# Altium PCB PCB-ForNAProj.PcbDoc
Units mm, origin at the board's own origin, x right, y up, seen from the top; angles counter-clockwise.
Board outline 180 x 225 mm, 2 copper layers (Top Layer, Bottom Layer); 119 components, 105 nets, 331 pads, 0 vias.
Unrouted connection lines stored in the file: 3.
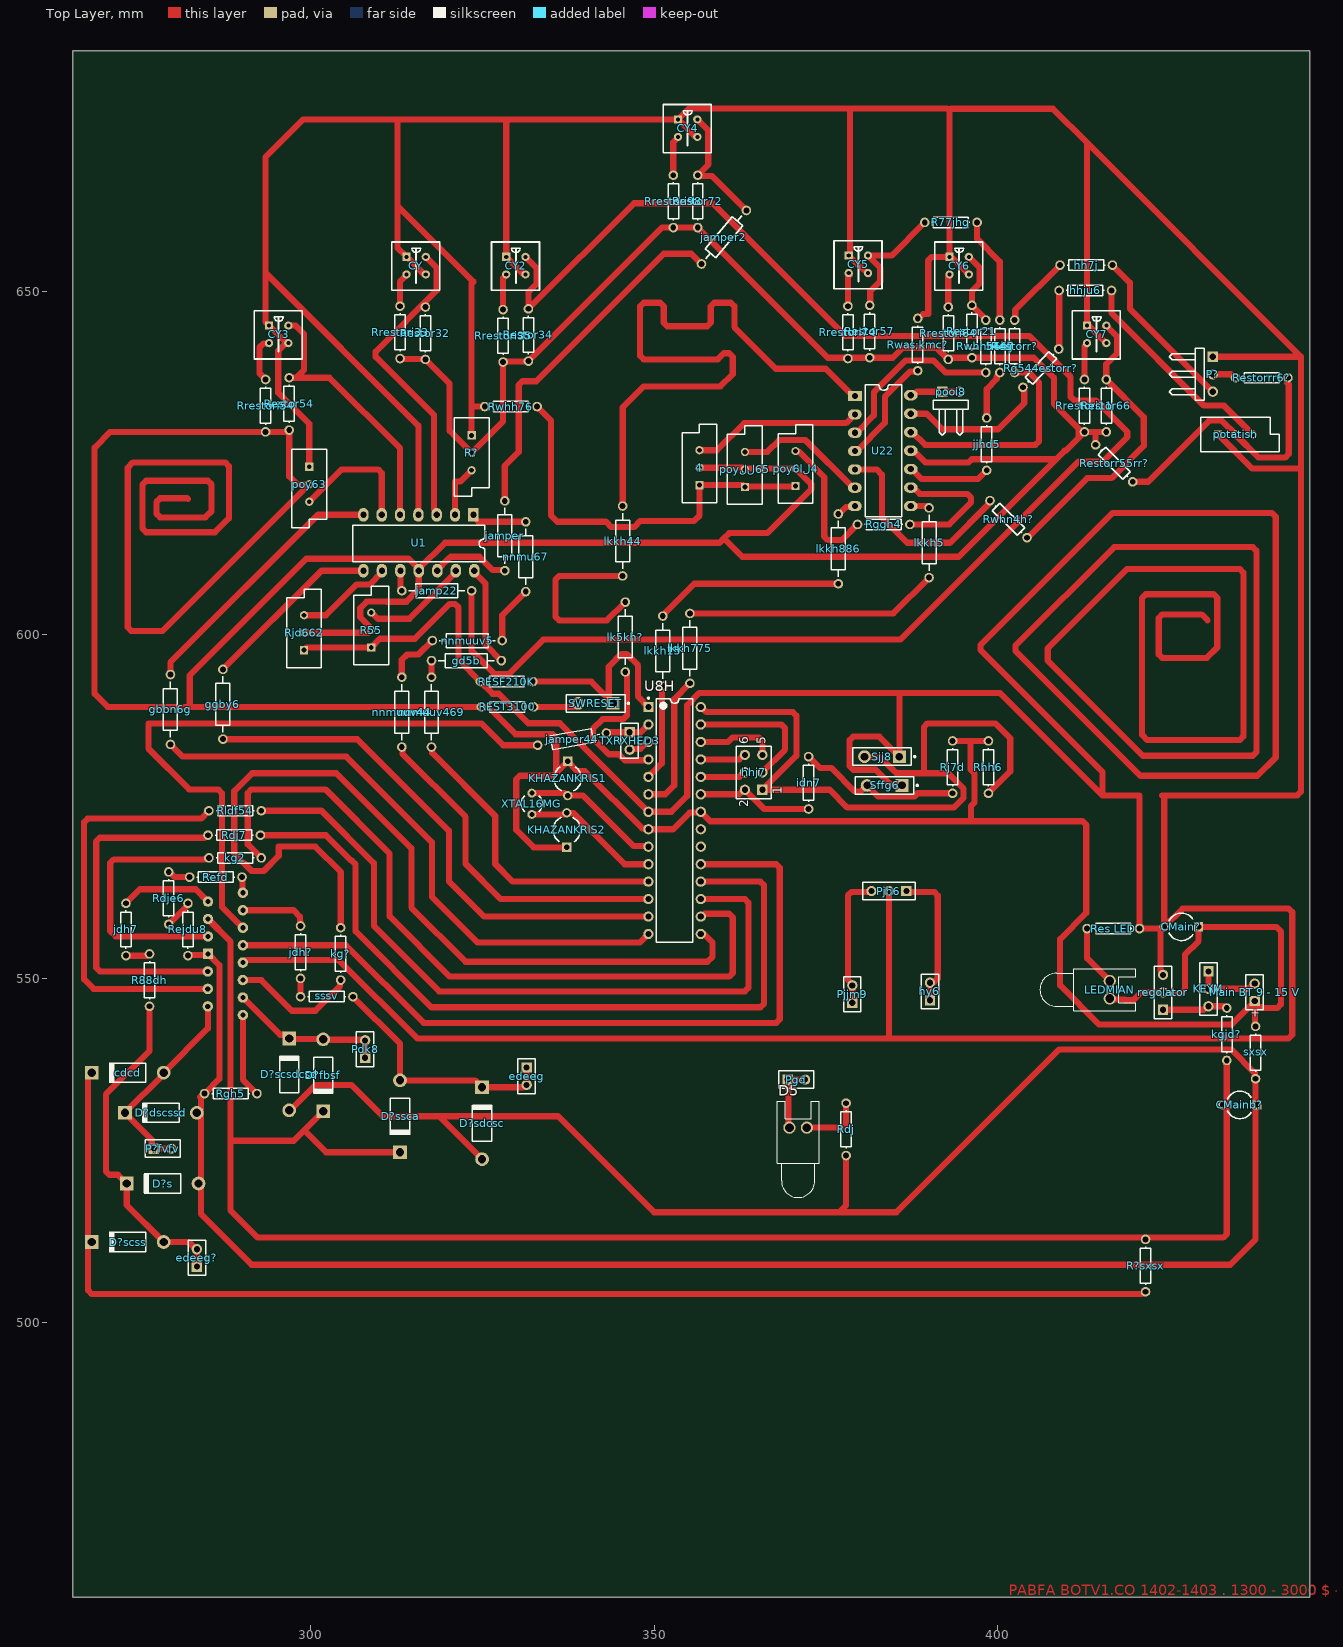
[diagram p0: Top Layer view]
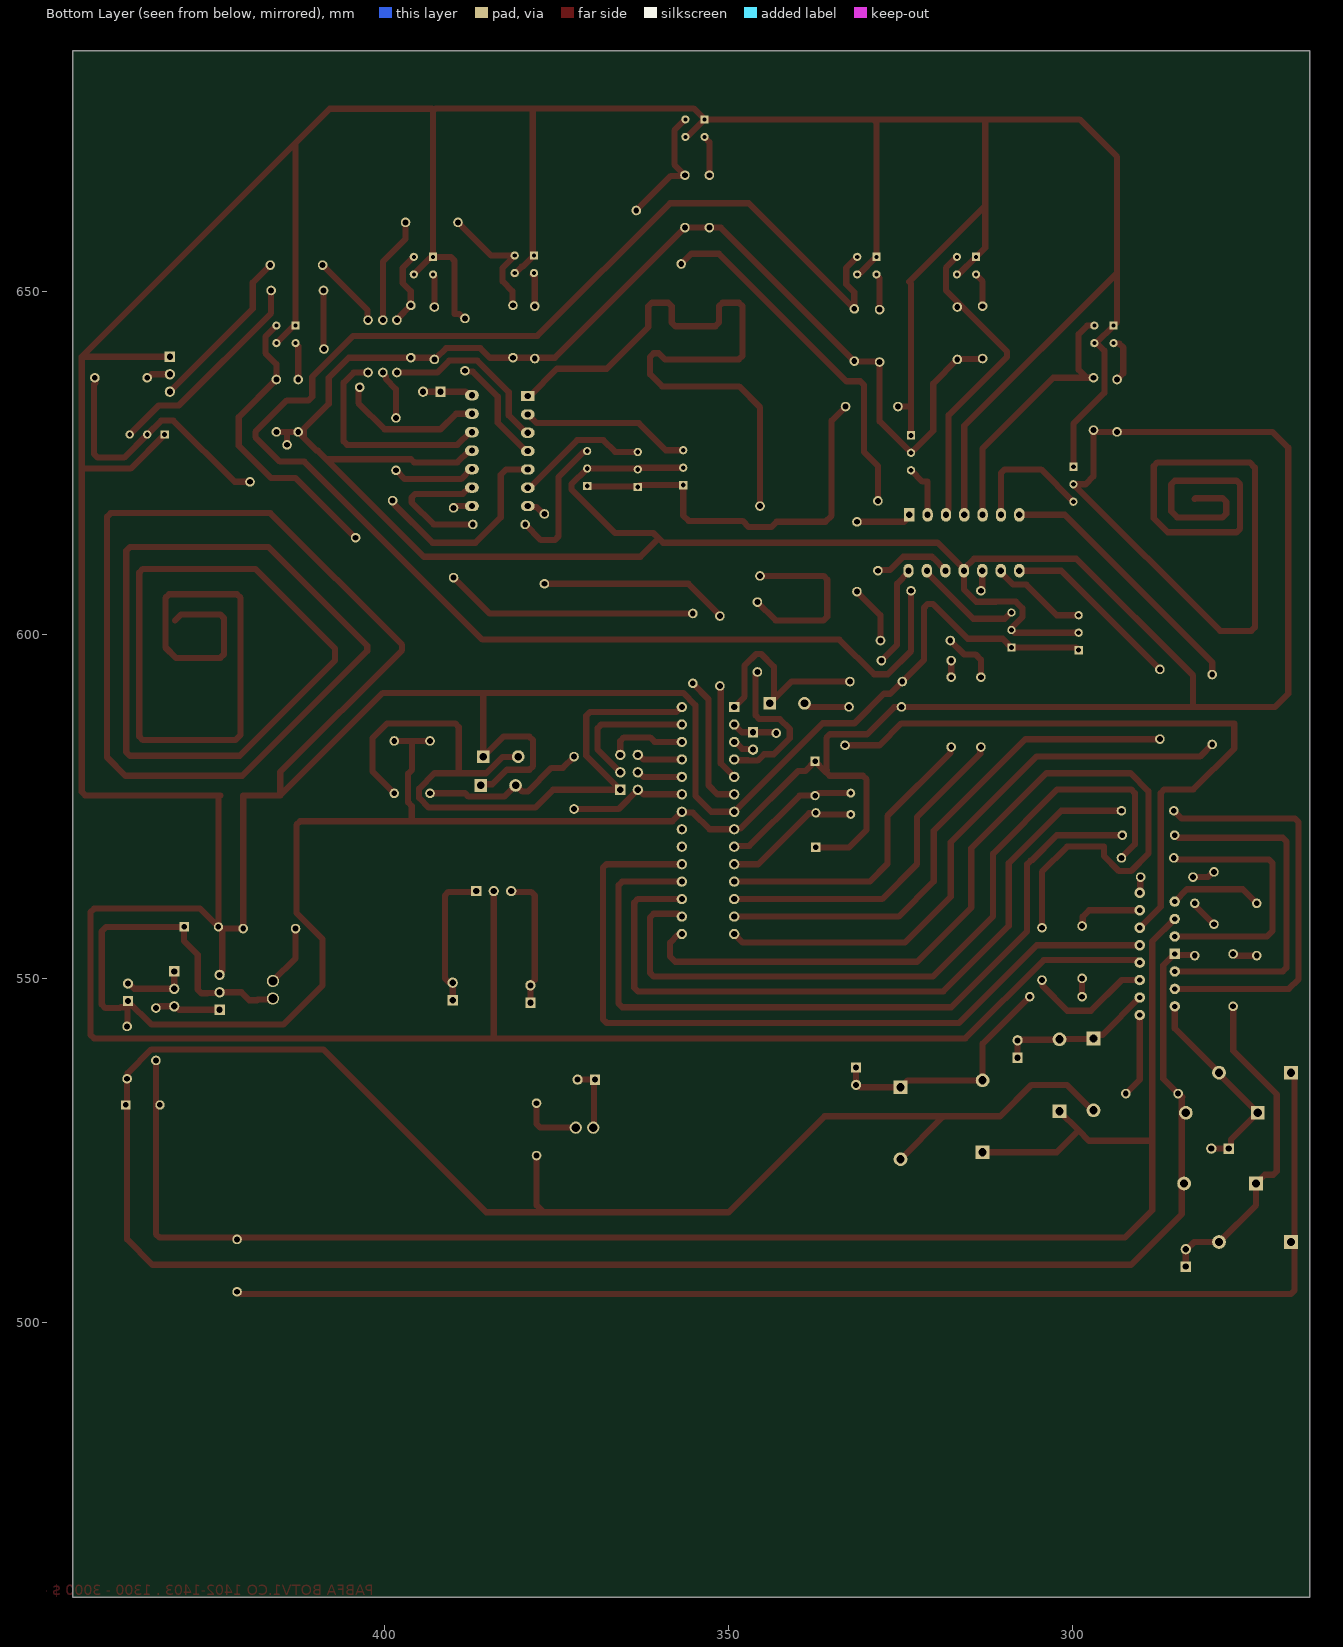
[diagram p1: Bottom Layer view, seen from below]

## Layer stack, top to bottom
Top Solder: solder mask 0.0102, Solder Resist, Dk 3.5
Top Layer: signal copper 0.0356
Dielectric 1: dielectric 0.32, FR-4, Dk 4.8
Bottom Layer: signal copper 0.0356
Bottom Solder: solder mask 0.0102, Solder Resist, Dk 3.5

## Board outline
265.43,459.994 265.43,684.994 445.43,684.994 445.43,459.994

## Design rules (kind name [scope] priority, off if disabled: settings)
Clearance [All] p1: gap=0.254 ignorepadtopadclearanceinfootprint=FALSE except(0: Arc-Hole Track-Hole SMDPad-Hole THPad-Hole Via-Hole Fill-Hole Poly-Hole Region-Hole Text-Hole; 0.7: Arc-Arc Arc-Track Track-Track)
PolygonConnect [All] p1: connectstyle=Relief reliefconductorwidth=0.254 reliefentries=4 polygonreliefangle="90 Angle" airgapwidth=0.254
RoutingVias [All] p1: holewidth=0.711 width=1.27 viastyle="Through Hole" minholewidth=0.711 minwidth=1.27 maxholewidth=0.711 maxwidth=1.27
SolderMaskExpansion [All] p1: expansion=0.102 istentingtop=FALSE
Width [All] p1: maxlimit=0.9 minlimit=0.7 preferedwidth=0.8
30 further rules are at their usual default settings.

## Components (designator, comment, footprint, x,y, rotation, side; value= is the part's Value field where it differs from the comment)
4 "RPot" VR5 356.616,624.332 r90 top value=1K
544lj "Res1" AXIAL-0.3 400.304,641.985 r270 top value=1K
* "driver" PCBComponent_1 290.195,562.483 r180 top
cdcd "Diode 1N4007" DO-41 273.431,536.321 r180 top
CMain? "Cap2IN" CAPR5-4X5 426.72,557.53 r180 top value=100pF
CMainb? "Cap2IN" CAPR5-4X5 435.229,531.622 r180 top value=100pF
CY "CY" CY70 314,655 r0 top
CY2 "CY" CY70 328.5,655 r0 top
CY3 "CY" CY70 294,645 r0 top
CY4 "CY" CY70 353.5,675 r0 top
CY5 "CY" CY70 378.327,655.193 r0 top
CY6 "CY" CY70 393,655 r0 top
CY7 "CY" CY70 413,645 r0 top
D5 "LED0" LED-0 370.967,528.32 r0 top
D?dscssd "Diode 1N4007" DO-41 278.257,530.479 r180 top
D?fbsf "Diode 1N4007" DO-41 301.879,535.94 r270 top
D?s "Diode 1N4007" DO-41 278.511,520.192 r180 top
D?scsdcsd "Diode 1N4007" DO-41 296.926,536.067 r90 top
D?scss "Diode 1N4007" DO-41 273.431,511.683 r180 top
D?sdcsc "Diode 1N4007" DO-41 324.993,528.955 r90 top
D?ssca "Diode 1N4007" DO-41 313.055,529.971 r270 top
edeeg "Header 2" HDR1X2 331.47,537.083 r270 top
edeeg? "Header 2" HDR1X2 283.492,508.102 r90 top
gbbn6g "Res2" AXIAL-0.4 279.654,589.153 r270 top value=1K
gd5b "Res2" AXIAL-0.4 322.707,596.265 r180 top value=1K
ggby6 "Res2" AXIAL-0.4 287.274,589.915 r270 top value=1K
hh7j "Res1" AXIAL-0.3 412.877,653.796 r180 top value=1K
hhj7 "Header 3X2" HDR2X3 365.76,577.469 r90 top
hhju6 "Res1" AXIAL-0.3 412.75,650.113 r0 top value=1K
hy6 "Header 2" HDR1X2 390.144,546.862 r90 top
idn7 "Res1" AXIAL-0.3 372.491,578.485 r270 top value=1K
jamp22 "Res2" AXIAL-0.4 318.389,606.425 r0 top value=1K
jamper "Res2" AXIAL-0.4 328.295,614.426 r90 top value=1K
jamper2 "Res2" AXIAL-0.4 360.172,657.86 r50 top value=1K
jamper44 "Res2" AXIAL-0.4 338.074,584.835 r10 top value=1K
jdh7 "Res1" AXIAL-0.3 273.177,557.149 r90 top value=1K
jdh? "Res1" AXIAL-0.3 298.577,553.847 r90 top value=1K
jjhd5 "Res1" AXIAL-0.3 398.399,627.761 r270 top value=1K
KEYM "Header 3" HDR1X3 430.657,551.053 r270 top
kg2 "Res1" AXIAL-0.3 289.052,567.563 r180 top value=1K
kg? "Res1" AXIAL-0.3 304.419,553.593 r270 top value=1K
kgjd? "Res1" AXIAL-0.3 433.324,541.909 r90 top value=1K
KHAZANKRIS1 "Cap2" CAPR5-4X5 337.439,579.12 r270 top value=100pF
KHAZANKRIS2 "Cap2" CAPR5-4X5 337.312,571.627 r90 top value=100pF
LEDMIAN "LED0" LED-0 416.306,548.386 r270 top
lk5kh? "Res2" AXIAL-0.4 345.821,599.694 r90 top value=1K
lkkh5 "Res2" AXIAL-0.4 390.017,613.41 r270 top value=1K
lkkh15 "Res2" AXIAL-0.4 351.282,597.662 r270 top value=1K
lkkh44 "Res2" AXIAL-0.4 345.44,613.664 r90 top value=1K
lkkh775 "Res2" AXIAL-0.4 355.219,598.043 r270 top value=1K
lkkh886 "Res2" AXIAL-0.4 376.809,612.521 r270 top value=1K
"Main BT 9 - 15 V" "Battery Main" BAT-2 437.388,548.005 r90 top
nnmu67 "Res2" AXIAL-0.4 331.343,611.378 r270 top value=1K
nnmuuv5 "Res2" AXIAL-0.4 322.834,599.186 r180 top value=1K
nnmuuv44 "Res2" AXIAL-0.4 313.309,588.772 r90 top value=1K
nnmuuv469 "Res2" AXIAL-0.4 317.627,588.772 r270 top value=1K
P? "Header 3H" HDR1X3H 431.292,640.461 r270 top
P?fvfv "Header 2" HDR1X2 277.241,525.272 r0 top
Pdk8 "Header 2" HDR1X2 307.975,538.48 r90 top
Pgd "Header 2" HDR1X2 369.443,535.305 r0 top
Pjh6 "Header 3" HDR1X3 386.715,562.737 r180 top
Pjjm9 "Header 2" HDR1X2 378.841,546.481 r90 top
pooi8 "Header 2H" HDR1X2H 391.922,635.381 r0 top
potatish "RPot" VR5 434.594,629.158 r0 top value=1K
poy6ال4 "RPot" VR5 370.586,624.205 r90 top value=1K
poy63 "RPot" VR5 299.847,621.919 r270 top value=1K
poyلل65 "RPot" VR5 363.22,624.078 r90 top value=1K
R55 "RPot" VR5 308.864,600.71 r90 top value=1K
R77jhg "Res1" AXIAL-0.3 393.192,660.019 r0 top value=1K
R88dh "Res1" AXIAL-0.3 276.606,549.783 r90 top value=1K
R? "RPot" VR5 323.469,626.491 r270 top value=1K
R?sxsx "Res1" AXIAL-0.3 421.513,508.254 r90 top value=1K
Rdj "Res1" AXIAL-0.3 377.952,528.066 r90 top value=1K
Rdj7 "Res1" AXIAL-0.3 288.925,570.865 r180 top value=1K
Rdje6 "Res1" AXIAL-0.3 279.4,561.721 r270 top value=1K
Refd "Res1" AXIAL-0.3 286.258,564.769 r180 top value=1K
regolator "Header 3" HDR1X3 424.053,545.465 r90 top
Rejdu8 "Res1" AXIAL-0.3 282.194,557.149 r270 top value=1K
"Res LED" "Res 220 LED" AXIAL-0.3 416.814,557.276 r180 top value=220
RESF210K "Res1" AXIAL-0.3 328.549,593.217 r0 top value=1K
REST3100 "Res1" AXIAL-0.3 328.676,589.534 r0 top value=1K
Restor21 "Res1" AXIAL-0.3 396.24,644.144 r270 top value=1K
Restor32 "Res1" AXIAL-0.3 316.738,643.89 r270 top value=1K
Restor34 "Res1" AXIAL-0.3 331.724,643.636 r270 top value=1K
Restor54 "Res1" AXIAL-0.3 296.926,633.603 r270 top value=1K
Restor57 "Res1" AXIAL-0.3 381.381,644.144 r270 top value=1K
Restor66 "Res1" AXIAL-0.3 415.798,633.349 r270 top value=1K
Restor72 "Res1" AXIAL-0.3 356.362,663.067 r270 top value=1K
Restorr55rr? "Res1" AXIAL-0.3 416.941,624.967 r135 top value=1K
Restorr? "Res1" AXIAL-0.3 402.463,641.985 r270 top value=1K
Restorrr6? "Res1" AXIAL-0.3 438.404,637.413 r0 top value=1K
Rg544estorr? "Res1" AXIAL-0.3 406.273,638.81 r227 top value=1K
Rggh4 "Res1" AXIAL-0.3 383.413,616.077 r180 top value=1K
Rgh5 "Res1" AXIAL-0.3 288.417,533.273 r0 top value=1K
Rhh6 "Res1" AXIAL-0.3 398.653,580.771 r270 top value=1K
Rj7d "Res1" AXIAL-0.3 393.446,580.771 r270 top value=1K
Rjd662 "RPot" VR5 299.085,600.329 r90 top value=1K
Rldf54 "Res1" AXIAL-0.3 289.052,574.421 r180 top value=1K
Rrestori11 "Res1" AXIAL-0.3 412.623,633.349 r90 top value=1K
Rrestori33 "Res1" AXIAL-0.3 313.055,644.017 r90 top value=1K
Rrestori35 "Res1" AXIAL-0.3 328.041,643.509 r90 top value=1K
Rrestori54 "Res1" AXIAL-0.3 293.497,633.349 r90 top value=1K
Rrestori64 "Res1" AXIAL-0.3 392.811,643.89 r90 top value=1K
Rrestori74 "Res1" AXIAL-0.3 378.206,644.017 r90 top value=1K
Rrestori98 "Res1" AXIAL-0.3 352.806,663.067 r90 top value=1K
Rwas;kmc? "Res1" AXIAL-0.3 388.366,642.239 r90 top value=1K
Rwhh76 "Res1" AXIAL-0.3 329.184,633.222 r0 top value=1K
Rwhhh6h? "Res1" AXIAL-0.3 398.272,641.985 r270 top value=1K
Rwhn4h? "Res1" AXIAL-0.3 401.574,616.839 r135 top value=1K
Sffg6 "SW-PB" SPST-2 383.54,578.104 r180 top
Sjj8 "SW-PB" SPST-2 383.159,582.295 r180 top
sssv "Res1" AXIAL-0.3 302.387,547.37 r180 top value=1K
SWRESET "SW-PB" SPST-2 341.503,590.042 r180 top
sxsx "Res1" AXIAL-0.3 437.515,539.242 r90 top value=1K
TXRXHED3 "Header 2" HDR1X2 346.456,585.851 r270 top
U1 "Lm324" Lm324 315.087,612.775 r180 top (schematic designator u1)
U8H "ATmega328-PU" 28P3 353,573 r0 top
U22 "Lm324" Lm324 383.921,626.11 r270 top
XTAL16MG "XTAL" R38 332.232,575.437 r180 top

## Footprints (in the part's own frame and the unit in brackets; to place one, negate y for a bottom-side part, rotate by r counter-clockwise, add the part's x,y. Pads: shape width x height; smd on the part's side, far side on the other; paste and mask are expansions set on the pad)
28P3 [mm] "28-Pin Plastic Dual In-Line Package (PDIP)"
  rect 1.5x1.5 hole 0.9: 1(-3.81,16.51)
  round 1.5 hole 0.9: 2(-3.81,13.97) 3(-3.81,11.43) 4(-3.81,8.89) 5(-3.81,6.35) 6(-3.81,3.81) 7(-3.81,1.27) 8(-3.81,-1.27) 9(-3.81,-3.81) 10(-3.81,-6.35) 11(-3.81,-8.89) 12(-3.81,-11.43) 13(-3.81,-13.97) 14(-3.81,-16.51) 15(3.81,-16.51) 16(3.81,-13.97) 17(3.81,-11.43) 18(3.81,-8.89) 19(3.81,-6.35) 20(3.81,-3.81) 21(3.81,-1.27) 22(3.81,1.27) 23(3.81,3.81) 24(3.81,6.35) 25(3.81,8.89) 26(3.81,11.43) 27(3.81,13.97) 28(3.81,16.51)
  silkscreen extent -3.93,-17.7 2.65,17.93, body extent -3.6,-17.65 3.6,17.65, height 4.58
AXIAL-0.3 [mm] "Axial Device, Thru-Hole; 2 Leads; 0.3 in Pin Spacing"
  round 1.4 hole 0.85: 1(-3.81,0) 2(3.81,0)
  silkscreen extent -2.77,-0.76 2.77,0.76
AXIAL-0.4 [mm] "Axial Device, Thru-Hole; 2 Leads; 0.4 in Pin Spacing"
  round 1.4 hole 0.85: 1(-5.08,0) 2(5.08,0)
  silkscreen extent -4.06,-1.02 4.06,1.02
BAT-2 [mm] "Battery; 2 Leads"
  rect 1.5x1.5 hole 0.9: 1(-1.27,0)
  round 1.5 hole 0.9: 2(1.27,0)
  silkscreen extent -2.54,-1.27 2.54,1.27
CAPR5-4X5 [mm] "Capacitor; 2 Leads"
  rect 1.35x1.35 hole 0.8: 1(-2.5,0)
  round 1.35 hole 0.8: 2(2.5,0)
  silkscreen extent -1.69,-2 1.82,2
CY70 [mm]
  round 1.2 hole 0.6: 5(2.8,0) 7(2.8,-2.55) 8(0,-2.55)
  rect 1.2x1.2 hole 0.6: 9(0,0)
  silkscreen extent -2.16,-4.85 4.84,2.15
DO-41 [mm] "Diode, Axial; Body 5.2 x 2.7 mm (LxDia. max), Lead Dia. 0.86 mm (max)"
  round 2 hole 1.2: 1(-5.23,0)
  rect 2x2 hole 1.2: 2(5.23,0)
  silkscreen extent -2.65,-1.4 2.75,1.4
HDR1X2 [mm] "Connector; Header; 2 Position"
  rect 1.5x1.5 hole 0.9: 1(0,0)
  round 1.5 hole 0.9: 2(2.54,0)
  silkscreen extent -1.27,-1.27 3.81,1.27
HDR1X2H [mm] "Connector; Header; 2 Position; Right Angle"
  rect 1.5x1.5 hole 0.9: 1(0,0)
  round 1.5 hole 0.9: 2(2.54,0)
  silkscreen extent -1.27,-6.35 3.81,-1.27
HDR1X3 [mm] "Connector; Header; 3 Position"
  rect 1.5x1.5 hole 0.9: 1(0,0)
  round 1.5 hole 0.9: 2(2.54,0) 3(5.08,0)
  silkscreen extent -1.27,-1.27 6.35,1.27
HDR1X3H [mm] "Connector; Header; 3 Position; Right Angle"
  rect 1.5x1.5 hole 0.9: 1(0,0)
  round 1.5 hole 0.9: 2(2.54,0) 3(5.08,0)
  silkscreen extent -1.27,-6.35 6.35,-1.27
HDR2X3 [mm] "Connector; Header; 3x2 Position"
  rect 1.5x1.5 hole 0.9: 1(0,0)
  round 1.5 hole 0.9: 2(0,2.54) 3(2.54,0) 4(2.54,2.54) 5(5.08,0) 6(5.08,2.54)
  silkscreen extent -1.27,-1.27 6.35,3.81
LED-0 [mil] "LED; 2 Leads"
  round 70 hole 50: 1(50,0) 2(-50,0)
  silkscreen extent -120,-400 120,150
Lm324 [mm]
  rect 1.5x2 hole 0.9: 1(-8.636,-4.699)
  oval 1.5x2 hole 0.9: 2(-5.969,-4.699) 3(-3.302,-4.699) 4(-0.635,-4.699) 5(2.032,-4.699) 6(4.699,-4.699) 7(7.366,-4.699) 8(7.366,3.429) 9(4.678,3.429) 10(1.99,3.429) 11(-0.699,3.429) 12(-3.387,3.429) 13(-6.075,3.429) 14(-8.763,3.429)
  silkscreen extent -10.29,-3.16 8.89,2.14, body extent -9.91,-5.23 8.51,3.94, height 4.24
PCBComponent_1 [mil]
  round 60 hole 30: 1(0,0) 2(200,50) 3(0,100) 4(200,150) 5(0,200) 6(200,250) 7(0,300) 9(0.21,399.52) 10(200.91,450.43) 11(0.21,499.52) 12(200.91,550.43) 13(0.21,599.52) 14(200.91,650.43) 15(0,700)
  rect 60x60 hole 30: 8(200,350)
R38 [mm] "Crystal, Thru-Hole; 2 Leads; Body 3.1 x 8.2 mm (Dia.xH)"
  round 1.3 hole 0.7: 1(0,1.55) 2(0,-1.55)
  silkscreen extent -1.55,-1.19 1.55,1.17
SPST-2 [mm] "Switch; 2 Leads"
  rect 1.85x1.85 hole 1.1: 1(-2.54,0)
  round 1.85 hole 1.1: 2(2.54,0)
  silkscreen extent -4.89,-1.27 4.28,1.27
VR5 [mm] "Thru-Hole; 3 Leads"
  rect 1.2x1.2 hole 0.7: 1(-2.54,0)
  round 1.2 hole 0.7: 2(0,0) 3(2.54,0)
  silkscreen extent -5.08,-2.54 6.35,2.54

## Part data
4 potatish poy6ال4 poy63 poyلل65 R55 R? Rjd662: "Potentiometer", LatestRevisionDate=17-Jul-2002, LatestRevisionNote="Re-released for DXP Platform.", PackageDescription="Variable Resistor, Thru-Hole; 3 Leads", PackageReference=VR5, Published=8-Jun-2000, Publisher="Altium Limited", Set Position=0.5, Sim Note="Enter the Resistance value and the set point into parameter fields."
544lj gbbn6g gd5b ggby6 hh7j hhju6 idn7 jamp22 jamper jamper2 jamper44 jdh7 jdh? jjhd5 kg2 kg? kgjd? lk5kh? lkkh5 lkkh15 lkkh44 lkkh775 lkkh886 nnmu67 nnmuuv5 nnmuuv44 nnmuuv469 R77jhg R88dh R?sxsx Rdj Rdj7 Rdje6 Refd Rejdu8 RESF210K REST3100 Restor21 Restor32 Restor34 Restor54 Restor57 Restor66 Restor72 Restorr55rr? Restorr? Restorrr6? Rg544estorr? Rggh4 Rgh5 Rhh6 Rj7d Rldf54 Rrestori11 Rrestori33 Rrestori35 Rrestori54 Rrestori64 Rrestori74 Rrestori98 Rwas;kmc? Rwhh76 Rwhhh6h? Rwhn4h? sssv sxsx: "Resistor", LatestRevisionDate=17-Jul-2002, LatestRevisionNote="Re-released for DXP Platform.", Published=8-Jun-2000, Publisher="Altium Limited"
  544lj hh7j hhju6 idn7 jdh7 jdh? jjhd5 kg2 kg? kgjd? R77jhg R88dh R?sxsx Rdj Rdj7 Rdje6 Refd Rejdu8 RESF210K REST3100 Restor21 Restor32 Restor34 Restor54 Restor57 Restor66 Restor72 Restorr55rr? Restorr? Restorrr6? Rg544estorr? Rggh4 Rgh5 Rhh6 Rj7d Rldf54 Rrestori11 Rrestori33 Rrestori35 Rrestori54 Rrestori64 Rrestori74 Rrestori98 Rwas;kmc? Rwhh76 Rwhhh6h? Rwhn4h? sssv sxsx: PackageDescription="Axial Device, Thru-Hole; 2 Leads; 0.3 in Pin Spacing", PackageReference=AXIAL-0.3
  gbbn6g gd5b ggby6 jamp22 jamper jamper2 jamper44 lk5kh? lkkh5 lkkh15 lkkh44 lkkh775 lkkh886 nnmu67 nnmuuv5 nnmuuv44 nnmuuv469: PackageDescription="Axial Device, Thru-Hole; 2 Leads; 0.4 in Pin Spacing", PackageReference=AXIAL-0.4
cdcd D?dscssd D?fbsf D?s D?scsdcsd D?scss D?sdcsc D?ssca: "1 Amp General Purpose Rectifier", Code_JEDEC=DO-204-AL, ComponentLink1Description="Manufacturer Link", ComponentLink1URL=http://www.fairchildsemi.com/, ComponentLink2Description=Datasheet, ComponentLink2URL=http://www.fairchildsemi.com/ds/1N%2F1N4001.pdf, DatasheetVersion=1998, LatestRevisionDate=17-Jul-2002, LatestRevisionNote="Re-released for DXP Platform.", PackageDescription="Diode, Axial; Body 5.2 x 2.7 mm (LxDia. max), Lead Dia. 0.86 mm (max)", PackageReference=DO-41, PackageVersion=Aug-1999, Published=8-Jun-2000, Publisher="Altium Limited"
CMain? CMainb?: library part Cap2, "Capacitor", PackageDescription="Capacitor; 2 Leads", PackageReference=CAPR5-4X5, Published=23-Sep-2002, Publisher="Altium Limited"
CY CY2 CY3 CY4 CY5 CY6 CY7: library part CY70, "LED MADON"
D5 LEDMIAN: "Typical INFRARED GaAs LED", LatestRevisionDate=08-Jul-2005, LatestRevisionNote="Mech Layer 1 removed.", PackageDescription="LED; 2 Leads", PackageReference=LED-0, Published=8-Jun-2000, Publisher="Altium Limited"
edeeg edeeg? hy6 P?fvfv Pdk8 Pgd Pjjm9 TXRXHED3: "Header, 2-Pin", LatestRevisionDate=17-Jul-2002, LatestRevisionNote="Re-released for DXP Platform.", Publisher="Altium Limited"
hhj7: "Header, 3-Pin, Dual row", LatestRevisionDate=17-Jul-2002, LatestRevisionNote="Re-released for DXP Platform.", Publisher="Altium Limited"
KEYM Pjh6 regolator: "Header, 3-Pin", LatestRevisionDate=17-Jul-2002, LatestRevisionNote="Re-released for DXP Platform.", Publisher="Altium Limited"
KHAZANKRIS1 KHAZANKRIS2: "Capacitor", PackageDescription="Capacitor; 2 Leads", PackageReference=CAPR5-4X5, Published=23-Sep-2002, Publisher="Altium Limited"
"Main BT 9 - 15 V": library part Battery, "Multicell Battery", LatestRevisionDate=17-Jul-2002, LatestRevisionNote="Re-released for DXP Platform.", PackageDescription="Battery; 2 Leads", PackageReference=BAT-2, Published=24-Mar-1999, Publisher="Altium Limited"
P?: "Header, 3-Pin, Right Angle", LatestRevisionDate=17-Jul-2002, LatestRevisionNote="Re-released for DXP Platform.", Publisher="Altium Limited"
pooi8: "Header, 2-Pin, Right Angle", LatestRevisionDate=17-Jul-2002, LatestRevisionNote="Re-released for DXP Platform.", Publisher="Altium Limited"
"Res LED": library part Res1, "Resistor", LatestRevisionDate=17-Jul-2002, LatestRevisionNote="Re-released for DXP Platform.", PackageDescription="Axial Device, Thru-Hole; 2 Leads; 0.3 in Pin Spacing", PackageReference=AXIAL-0.3, Published=8-Jun-2000, Publisher="Altium Limited"
Sffg6 Sjj8 SWRESET: "Switch", LatestRevisionDate=17-Jul-2002, LatestRevisionNote="Re-released for DXP Platform.", PackageDescription="Switch; 2 Leads", PackageReference=SPST-2, Published=24-Mar-1999, Publisher="Altium Limited"
U1 U22: library part LM324, Creator=www.ALIAco.ir, Tel=05132244449
U8H: "8-bit AVR Microcontroller, 32KB Flash, 1KB EEPROM, 2KB SRAM, 28-pin PDIP, Industrial Grade (-40°C to 85°C)", ComponentLink1Description="Manufacturer URL", ComponentLink1URL=http://www.atmel.com/, ComponentLink2Description="ATmega48A/48PA/88A/88PA/168A/168PA/328/328P Datasheet", ComponentLink2URL=http://www.atmel.com/dyn/resources/prod_documents/8271.pdf, ComponentLink3Description="ATmega48A/48PA/88A/88PA/168A/168PA/328/328P Summary", ComponentLink3URL=http://www.atmel.com/dyn/resources/prod_documents/8271S.pdf, DatasheetVersion="revD, May-2011", PackageDescription="28-lead (0.300\"/7.62mm Wide) Plastic Dual Inline Package (PDIP)", PackageReference=28P3, PackageVersion="revB, Sep-2001"
XTAL16MG: "Crystal Oscillator", LatestRevisionDate=17-Jul-2002, LatestRevisionNote="Re-released for DXP Platform.", PackageDescription="Crystal, Thru-Hole; 2 Leads; Body 3.1 x 8.2 mm (Dia.xH)", PackageReference=R38, Published=8-Jun-2000, Publisher="Altium Limited"

## Nets (pads, with @x,y where several pads share a name; then routed paths per layer and width w, separated by ;. In a path a pad name is that pad's centre, name@x,y a point inside that pad or via, vN(x,y) a via of type N, cw(c..) or ccw(c..) an arc to the next point about the centre after c; other vN are vias at no path point)
GND: 4.2 "Main BT 9 - 15 V.1" *.8 CMain?.1 CMainb?.1 CY.5 D?dscssd.1 D?s.1 D?scsdcsd.1 D?sdcsc.1 KHAZANKRIS1.1 KHAZANKRIS2.1 LEDMIAN.1 poy6ال4.2 poy63.2 poyلل65.2 R55.2 R?.2 Rdj.1 regolator.2 Rejdu8.2 REST3100.1 Restor21.2 Restor32.1 Restor32.2 Restor34.2 Restor54.2 Restor57.2 Restor66.2 Restor72.2 Restorr55rr?.2 Rgh5.1 Rhh6.1 Rj7d.1 Rjd662.2 Rrestori11.1 Rrestori33.1 Rrestori35.1 Rrestori54.1 Rrestori64.1 Rrestori74.1 Rrestori98.1 sxsx.1 sxsx.2 U1.3 U1.11 U8H.8 U8H.22 U22.11 | length 1346.6
  Top Layer w0.9: Rejdu8.2 282.29,553.435 284.957,553.435 *.8 286.766,551.942 286.766,535.432 Rgh5.1 284.472,533.273 283.964,532.765 ; 282.194,619.76 282.067,619.887 278.149,619.887 277.622,619.36 277.622,617.62 278.149,617.093 284.734,617.093 285.623,617.982 285.623,621.9 285.096,622.427 276.117,622.427 275.59,621.9 275.59,615.461 276.117,614.934 286.131,614.934 288.163,616.966 288.163,624.567 287.636,625.094 274.193,625.094 273.431,624.332 273.431,601.11 273.958,600.583 278.511,600.583 poy63.2 298.069,621.919 296.926,623.062 Restor54.2 296.791,629.793 296.537,629.539 Rrestori54.1 270.891,629.539 268.605,627.253 268.605,591.439 270.51,589.534 282.448,589.534 ; D?dscssd.1 283.591,530.479 D?dscssd.1@283.591,530.352 ; D?dscssd.1@284.099,530.352 284.099,515.747 291.465,508.381 433.832,508.381 437.515,512.064 sxsx.1 437.419,535.528 437.419,536.266 433.987,539.699 408.972,539.699 385.274,516.001 376.936,516.001 ; D?dscssd.1@284.099,530.479 284.099,532.63 ; D?scsdcsd.1 297.095,530.837 300.801,534.543 305.943,534.543 310.515,529.971 318.897,529.971 ; Rjd662.2 R55.2@308.402,600.329 ; R55.2 308.807,600.767 308.807,601.045 307.264,602.587 307.264,603.913 308.201,604.85 311.074,604.85 311.099,604.825 313.972,604.825 315.786,606.639 U1.11@315.786,609.596 ; Rrestori33.1 313.118,640.144 316.674,640.144 Restor32.2 320.25,636.568 320.25,629.71 R?.2 328.041,631.063 Rrestori35.1 328.104,639.762 331.661,639.762 Restor34.2 351.155,659.257 Rrestori98.1 Restor72.2 375.285,640.334 Restor57.2 384.73,640.334 386.127,641.731 391.113,641.731 Rrestori64.1@392.624,640.22 ; CY.5 318.4,653.4 318.4,650.124 309.491,641.215 309.491,640.469 318.008,631.952 318.008,618.267 318.389,617.886 U1.3 ; D?sdcsc.1 318.897,529.821 318.897,529.971 ; KHAZANKRIS2.1 337.272,569.087 332.486,569.087 329.946,571.627 329.946,578.974 330.473,579.501 335.32,579.501 336.082,580.263 ; 4.2 362.885,624.332 363.139,624.078 poyلل65.2 363.301,624.078 363.428,624.205 poy6ال4.2 372.872,621.919 372.872,621.173 366.506,614.807 360.934,614.807 360.172,614.045 ; Rdj.1 377.952,517.017 376.936,516.001 ; U22.11 387.762,626.809 389.477,625.094 395.772,625.094 396.229,625.551 408.508,625.551 ; Rrestori64.1@392.51,640.334 Restor21.2 405.257,640.334 408.178,637.413 408.178,633.603 411.797,629.983 411.797,628.713 ; Rj7d.1 396.049,584.581 ; Rhh6.1 396.049,584.581 ; Restorr55rr?.2 414.247,629.503 414.21,629.539 ; Restor66.2 414.21,629.539 ; LEDMIAN.1 416.474,546.948 418.512,546.948 418.598,546.862 419.735,546.862 420.878,548.005 regolator.2 424.168,547.89 425.789,547.89 425.801,547.878 426.701,547.878 427.228,548.405 427.228,553.466 429.22,555.458 CMain?.1 440.544,557.53 441.198,556.876 441.198,546.246 440.671,545.719 438.531,545.719 438.404,545.846 437.452,545.846 ; 437.388,545.846 437.452,545.846 ; sxsx.2 437.452,543.115 437.452,545.846 ; 282.448,589.534 REST3100.1 324.908,589.492 325.924,589.492 329.863,585.553 335.261,585.553 335.788,585.026 335.788,580.39 335.74,580.342 335.82,580.263 336.082,580.263 ; 282.448,589.534 282.448,594.106 299.423,611.081 314.301,611.081 U1.11@315.786,609.596 ; U1.11@315.786,609.596 319.6,613.41 359.537,613.41 360.172,614.045 ; 318.897,529.971 336.042,529.971 350.012,516.001 376.936,516.001 ; 336.082,580.263 KHAZANKRIS1.1 338.858,580.201 339.914,580.201 348.27,571.845 349.075,571.845 U8H.8 352.782,571.73 355.207,574.155 356.695,574.155 U8H.22 358.183,572.897 396.113,572.897 ; 360.172,614.045 362.839,611.378 394.335,611.378 408.508,625.551 ; 396.049,584.581 396.049,580.407 396.646,579.81 396.646,575.636 396.113,575.103 396.113,572.897 ; 396.113,572.897 412.35,572.897 412.877,572.37 412.877,559.562 409.067,555.752 409.067,549.021 414.782,543.306 433.959,543.306 437.388,546.735 437.452,546.671 437.452,545.846 ; 408.508,625.551 409.765,626.809 409.829,626.745 411.797,628.713 ; 411.797,628.713 Rrestori11.1 414.21,629.539
Net4_1: 4.1 poy6ال4.1 poyلل65.1 Rwhh76.2 | length 58.2
  Top Layer w0.9: Rwhh76.2 335.026,631.19 335.026,617.366 335.934,616.458 343.027,616.458 343.789,615.696 347.091,615.696 347.98,616.585 355.835,616.585 356.616,617.366 4.1 362.966,621.792 poyلل65.1 363.284,621.601 370.522,621.601 poy6ال4.1
Net4_3: 4.3 U22.2 | length 24.8
  Top Layer w0.9: 4.3 359.156,626.872 363.093,630.809 377.952,630.809 378.672,631.529 378.672,631.617 379.134,632.079 U22.2
Net544lj_1: 544lj.1 R77jhg.2 | length 15.6
  Top Layer w0.9: R77jhg.2 397.002,657.606 400.304,654.304 544lj.1
Net544lj_2: 544lj.2 jjhd5.1 | length 7.4
  Top Layer w0.9: jjhd5.1 398.399,635.762 399.872,637.235 399.872,637.608 400.304,638.04 544lj.2
Net*_1: *.1 Refd.1 | length 2.3
  Top Layer w0.9: Refd.1 290.131,564.706 290.131,562.546 *.1
Net*_2: *.2 jdh7.2 | length 13.7
  Top Layer w0.9: jdh7.2 275.209,562.991 283.337,562.991 *.2 *.2@284.946,561.213
Net*_3: *.3 jdh?.2 | length 9.4
  Top Layer w0.9: *.3 297.561,559.943 298.481,559.023 298.481,558.388 jdh?.2@298.577,558.292
Net*_4: *.4 cdcd.2 CMainb?.2 D?fbsf.2 D?scss.2 D?ssca.2 kgjd?.1 R?sxsx.1 R?sxsx.2 | length 432.5
  Top Layer w0.9: cdcd.2 267.674,535.794 267.674,504.632 268.202,504.105 421.038,504.105 421.378,504.444 R?sxsx.1 ; *.4 288.366,555.422 288.366,526.415 ; D?fbsf.2 299.097,527.928 ; D?ssca.2 302.283,524.741 299.097,527.928 ; kgjd?.1 433.324,512.845 432.797,512.318 292.354,512.318 288.366,516.306 288.366,526.415 ; 288.366,526.415 297.584,526.415 299.097,527.928
Net*_5: *.5 jamper44.1 | length 95.8
  Top Layer w0.9: *.5 287.147,560.451 287.147,576.993 286.62,577.52 282.397,577.52 276.458,583.459 276.458,587.121 324.866,587.121 328.034,583.953 jamper44.1
Net*_6: *.6 kg2.2 | length 39.1
  Top Layer w0.9: *.6 271.672,556.133 270.891,556.914 270.891,566.823 271.418,567.35 284.676,567.35 284.793,567.467 285.146,567.467 kg2.2
Net*_7: *.7 U8H.19 | length 116.7
  Top Layer w0.9: *.7 305.181,554.863 316.484,543.56 367.773,543.56 368.3,544.087 368.3,566.123 367.773,566.65 U8H.19
Net*_10: *.10 Rdj7.2 | length 51.5
  Top Layer w0.9: *.10 269.386,551.042 268.859,551.569 268.859,569.957 269.386,570.484 284.599,570.484 284.98,570.865 Rdj7.2
Net*_11: *.11 kg?.2 | length 18.4
  Top Layer w0.9: *.11 292.85,549.795 297.307,545.338 300.736,545.338 304.323,548.925 304.323,549.687 kg?.2
Net*_12: *.12 Rldf54.2 | length 60.3
  Top Layer w0.9: *.12 268.489,548.502 267.081,549.91 267.081,572.751 267.608,573.278 284.099,573.278 Rldf54.2
Net*_13: *.13 D?fbsf.1 D?scsdcsd.2 Pdk8.1 Pdk8.2 | length 22.9
  Top Layer w0.9: *.13 295.598,541.847 296.376,541.847 D?scsdcsd.2 296.989,541.233 301.815,541.233 D?fbsf.1 301.954,541.095 307.9,541.095 Pdk8.2 Pdk8.1
Net*_14: *.14 cdcd.1 D?dscssd.2 P?fvfv.1 P?fvfv.2 | length 30
  Top Layer w0.9: P?fvfv.2 P?fvfv.1 276.941,525.572 276.941,526.565 D?dscssd.2 278.661,536.113 cdcd.1 285.092,542.752 *.14
Net*_15: *.15 Rgh5.2 | length 12.3
  Top Layer w0.9: *.15 290.195,535.305 Rgh5.2
NetCY2_5: CY2.5 jamp22.2 Restor34.1 | length 238.3
  Top Layer w0.9: jamp22.2 323.469,597.662 326.846,594.285 328.855,594.285 333.883,599.313 385.826,599.313 411.734,625.221 415.29,625.221 418.854,628.785 418.854,629.531 414.274,634.111 411.118,634.111 410.591,634.638 410.591,637.54 404.622,643.509 377.825,643.509 358.521,662.813 347.091,662.813 Restor34.1 331.724,649.846 332.9,651.022 332.9,653.4 CY2.5
NetCY2_8: CY2.8 Rrestori35.2 | length 5.3
  Top Layer w0.9: Rrestori35.2 328.041,651.91 328.5,652.369 CY2.8
NetCY3_5: CY3.5 Restor54.1 U1.5 | length 39.7
  Top Layer w0.9: CY3.5 297.848,645 299.085,643.763 299.085,638.556 297.942,637.413 ; Restor54.1 297.942,637.413 ; U1.5 313.055,627.126 302.768,637.413 297.942,637.413
NetCY3_8: CY3.8 Rrestori54.2 | length 6.7
  Top Layer w0.9: Rrestori54.2 292.608,638.048 292.608,641.83 293.171,642.393 293.943,642.393 CY3.8
NetCY4_5: CY4.5 jamper2.2 Restor72.1 | length 18.6
  Top Layer w0.9: CY4.5 357.9,673.4 357.9,668.415 Restor72.1 356.458,666.781 358.408,666.781 jamper2.2
NetCY4_8: CY4.8 Rrestori98.2 | length 5.9
  Top Layer w0.9: Rrestori98.2 352.806,671.675 353.5,672.369 CY4.8
NetCY5_5: CY5.5 R77jhg.1 Restor57.1 | length 18.6
  Top Layer w0.9: CY5.5 384.556,655.193 R77jhg.1 ; CY5.5@381.3,655 382.9,653.4 382.9,651.447 381.457,650.004 381.457,648.03 Restor57.1
NetCY5_8: CY5.8 Rrestori74.2 | length 4.7
  Top Layer w0.9: Rrestori74.2 378.206,652.075 378.5,652.369 CY5.8@378.5,652.45
NetCY6_5: CY6.5 Restor21.1 Rwhhh6h?.1 | length 10.9
  Top Layer w0.9: CY6.5 397.4,653.4 397.4,651.181 396.24,650.021 Restor21.1 Rwhhh6h?.1@398.176,646.018
NetCY6_8: CY6.8 Rrestori64.2 | length 5.1
  Top Layer w0.6: CY6.8@392.811,652.261 CY6.8
  Top Layer w0.9: Rrestori64.2 392.811,652.18 393,652.369 CY6.8
NetCY7_5: CY7.5 Restor66.1 Rwhn4h?.1 | length 43.6
  Top Layer w0.9: Rwhn4h?.1 404.341,614.145 413.004,622.808 416.56,622.808 421.267,627.515 421.267,628.261 421.259,628.269 421.259,631.698 Restor66.1 415.798,639.403 417.4,641.005 417.4,643.4 CY7.5
NetCY7_8: CY7.8 Rrestori11.2 | length 5.4
  Top Layer w0.9: Rrestori11.2 412.623,641.992 413,642.369 CY7.8
NetCY_8: CY.8 Rrestori33.2 | length 5
  Top Layer w0.9: Rrestori33.2 313.055,651.424 314,652.369 CY.8
NetD5_1: D5.1 Rdj.2 | length 9
  Top Layer w0.9: D5.1 377.425,528.32 377.952,528.847 Rdj.2
NetD5_2: D5.2 Pgd.1 Pgd.2 | length 9.6
  Top Layer w0.9: D5.2 369.57,528.447 369.57,535.178 Pgd.1 Pgd.2
NetD?s_2: D?s.2 D?scss.1 edeeg?.1 edeeg?.2 R88dh.1 | length 48.9
  Top Layer w0.9: R88dh.1 276.606,539.496 270.256,533.146 270.256,521.989 270.783,521.462 272.011,521.462 D?s.2 273.281,517.063 D?scss.1 282.289,511.683 283.329,510.642 edeeg?.2 edeeg?.1
NetD?sdcsc_2: D?sdcsc.2 D?ssca.1 edeeg.1 edeeg.2 sssv.1 | length 35.9
  Top Layer w0.9: sssv.1 313.055,540.512 D?ssca.1 323.977,535.201 D?sdcsc.2 edeeg.2@330.95,534.185 ; edeeg.2 edeeg.1
Netgbbn6g_1: gbbn6g.1 U1.7 | length 38.8
  Top Layer w0.9: gbbn6g.1@279.654,594.118 279.654,596.011 301.117,617.474 U1.7
Netgbbn6g_2: gbbn6g.2 U8H.14 | length 86.6
  Top Layer w0.9: gbbn6g.2 281.432,582.295 305.236,582.295 317.682,569.849 317.682,561.92 324.358,555.244 347.944,555.244 U8H.14
Netgd5b_1: gd5b.1 U1.14 | length 14.7
  Top Layer w0.9: U1.14 323.85,609.096 325.501,607.445 325.501,598.551 gd5b.1
Netgd5b_2: gd5b.2 nnmuuv469.1 | length 2.4
  Top Layer w0.9: nnmuuv469.1 gd5b.2
Netggby6_1: ggby6.1 U1.8 | length 26.4
  Top Layer w0.9: ggby6.1 301.625,609.346 U1.8
Netggby6_2: ggby6.2 U8H.13 | length 76.9
  Top Layer w0.9: ggby6.2 306.832,584.835 320.167,571.5 320.167,564.134 325.271,559.03 U8H.13
Nethh7j_1: hh7j.1 P?.3 | length 24.5
  Top Layer w0.9: hh7j.1 419.227,651.256 419.227,647.446 P?.3
Nethh7j_2: hh7j.2 Restorr?.1 | length 10.7
  Top Layer w0.9: Restorr?.1 402.559,645.891 402.559,647.288 hh7j.2
Nethhj7_1: hhj7.1 Rhh6.2 Sjj8.2 U8H.28 | length 105.6
  Top Layer w0.9: U8H.28 356.899,589.51 357.637,588.772 370.186,588.772 370.713,588.245 370.713,582.422 hhj7.1 375.539,577.469 378.133,574.875 393.623,574.875 395.046,576.298 395.046,577.624 392.801,579.868 389.255,579.868 385.28,579.868 384.758,580.39 382.894,582.254 380.66,582.254 Sjj8.2 ; 389.255,579.875 389.255,586.594 389.782,587.121 399.669,587.121 401.828,584.962 401.828,580.136 Rhh6.2
Nethhj7_2: hhj7.2 idn7.2 U8H.23 | length 17.1
  Top Layer w0.9: U8H.23 362.399,576.81 363.058,577.469 hhj7.2 366.014,574.675 idn7.2
Nethhj7_3: hhj7.3 U8H.27 | length 20.3
  Top Layer w0.9: U8H.27 368.535,586.97 369.062,586.443 369.062,583.311 hhj7.3
Nethhj7_4: hhj7.4 U8H.24 | length 6.7
  Top Layer w0.9: U8H.24 362.399,579.35 363.058,580.009 hhj7.4
Nethhj7_5: hhj7.5 U8H.26 | length 11.5
  Top Layer w0.9: U8H.26 360.773,584.43 361.432,585.089 365.233,585.089 365.76,584.562 hhj7.5
Nethhj7_6: hhj7.6 U8H.25 | length 6.7
  Top Layer w0.9: U8H.25 362.399,581.89 363.058,582.549 hhj7.6
Nethhju6_1: hhju6.1 Rg544estorr?.1 | length 8.6
  Top Layer w0.9: Rg544estorr?.1@408.94,641.561 hhju6.1
Nethhju6_2: hhju6.2 potatish.3 | length 31.2
  Top Layer w0.9: hhju6.2 416.56,646.811 429.993,633.378 432.914,633.378 potatish.3
Nethy6_1: hy6.1 hy6.2 Pjh6.1 | length 20.2
  Top Layer w0.9: Pjh6.1 386.842,562.61 390.76,562.61 391.287,562.083 391.287,550.037 hy6.2@390.767,549.517 ; hy6.1 hy6.2
Netidn7_1: idn7.1 Rj7d.2 Sffg6.2 | length 24.3
  Top Layer w0.9: idn7.1 374.142,580.644 375.794,580.644 379.223,577.215 379.998,577.215 380.887,578.104 Sffg6.2 382.629,576.475 387.855,576.475 388.341,576.961 Rj7d.2
Netjamp22_1: jamp22.1 U1.10 | length 3.2
  Top Layer w0.9: U1.10 313.097,606.772 313.309,606.56 jamp22.1 ; U1.10@313.267,608.904 U1.10@313.267,609.092
Netjamper2_1: jamper2.1 jamper.2 | length 52.9
  Top Layer w0.9: jamper.2 328.295,624.586 330.327,626.618 330.327,636.378 330.854,636.905 332.867,636.905 351.409,655.447 355.428,655.447 jamper2.1 jamper2.1@356.907,654.104
Netjamper44_2: jamper44.2 TXRXHED3.1 U8H.2 | length 6.7
  Top Layer w0.9: jamper44.2@343.027,585.978 343.154,585.851 TXRXHED3.1 348.071,585.851 U8H.2
Netjamper_1: jamper.1 U1.12 | length 11.6
  Top Layer w0.9: U1.12 318.474,609.434 320.164,611.124 320.167,611.124 320.423,611.38 324.61,611.38 326.548,609.442 328.199,609.442 jamper.1
Netjdh7_1: jdh7.1 R88dh.2 | length 3.5
  Top Layer w0.9: jdh7.1 276.217,553.339 276.471,553.593 R88dh.2
Netjdh?_1: jdh?.1 sssv.2 | length 2.7
  Top Layer w0.9: sssv.2 jdh?.1
Netjjhd5_2: jjhd5.2 U22.10 | length 12.2
  Top Layer w0.9: U22.10 387.496,624.12 388.935,622.681 397.114,622.681 398.384,623.951 jjhd5.2
NetKEYM_1: "Main BT 9 - 15 V.2" KEYM.1 KEYM.2 | length 9.6
  Top Layer w0.9: KEYM.1 KEYM.2 436.464,548.513 437.226,549.275 437.388,549.275
NetKEYM_3: KEYM.3 kgjd?.2 regolator.1 | length 9.6
  Top Layer w0.9: regolator.1 429.987,545.465 430.495,545.973 KEYM.3 432.935,545.973 433.189,545.719 kgjd?.2
Netkg2_1: kg2.1 U8H.16 | length 111
  Top Layer w0.9: kg2.1 290.906,569.519 290.906,576.993 291.433,577.52 302.209,577.52 311.531,568.198 311.531,559.054 320.294,550.291 360.915,550.291 361.442,550.818 361.442,558.908 360.915,559.435 357.377,559.435 356.972,559.03 U8H.16
Netkg?_1: kg?.1 U8H.15 | length 129.2
  Top Layer w0.9: kg?.1 304.419,565.531 300.736,569.214 295.402,569.214 295.402,567.84 293.22,565.658 291.465,565.658 288.925,568.198 288.925,577.275 291.532,579.882 303.784,579.882 314.706,568.96 314.706,560.324 322.58,552.45 357.759,552.45 358.521,553.212 358.521,555.244 357.39,556.375 356.925,556.375 U8H.15
NetKHAZANKRIS1_2: KHAZANKRIS1.2 U8H.9 XTAL16MG.2 | length 20.2
  Top Layer w0.9: XTAL16MG.2 336.95,576.987 337.317,576.62 KHAZANKRIS1.2 339.685,576.62 347,569.305 349.075,569.305 U8H.9
NetKHAZANKRIS2_2: KHAZANKRIS2.2 U8H.10 XTAL16MG.1 | length 20.3
  Top Layer w0.6: XTAL16MG.1 XTAL16MG.1@332.352,574.007
  Top Layer w0.9: XTAL16MG.1 336.95,573.887 337.19,574.127 KHAZANKRIS2.2 337.379,574.06 338.308,574.06 345.718,566.65 U8H.10
NetLEDMIAN_2: "Res LED.2" LEDMIAN.2 | length 9
  Top Layer w0.9: 413.004,557.276 413.004,552.958 LEDMIAN.2
Netlk5kh?_1: lk5kh?.1 U8H.4 | length 23.1
  Top Layer w0.9: lk5kh?.1 345.821,594.479 346.075,594.225 346.075,588.283 345.548,587.756 342.542,587.756 341.122,586.336 341.122,584.962 343.436,582.648 344.856,582.648 345.793,581.711 347.119,581.711 347.183,581.775 349.075,581.775 U8H.4
Netlk5kh?_2: lk5kh?.2 lkkh44.1 | length 26.9
  Top Layer w0.9: lkkh44.1 336.188,608.584 335.661,608.057 335.661,602.634 336.188,602.107 343.154,602.107 lk5kh?.2
Netlkkh5_1: lkkh5.1 U22.8 | length 2.8
  Top Layer w0.9: U22.8 389.628,618.744 389.882,618.49 lkkh5.1
Netlkkh5_2: lkkh5.2 lkkh775.1 | length 37
  Top Layer w0.9: lkkh775.1 384.81,603.123 lkkh5.2
Netlkkh15_1: lkkh15.1 lkkh886.2 | length 27.6
  Top Layer w0.9: lkkh15.1@351.155,602.742 355.854,607.441 lkkh886.2
Netlkkh15_2: lkkh15.2 U8H.5 | length 14
  Top Layer w0.9: U8H.5 351.155,581.315 lkkh15.2@351.155,592.582
Netlkkh44_2: lkkh44.2 U22.1 | length 100.8
  Top Layer w0.9: lkkh44.2 345.44,633.095 348.488,636.143 359.664,636.143 361.442,637.921 361.442,640.439 360.915,640.966 360.169,640.966 359.283,640.08 348.507,640.08 347.98,640.607 347.98,647.808 348.507,648.335 350.882,648.335 351.409,647.808 351.409,645.433 351.936,644.906 357.74,644.906 358.267,645.433 358.267,647.808 358.794,648.335 361.169,648.335 361.696,647.808 361.696,644.779 367.741,638.734 374.984,638.734 378.972,634.746 U22.1
Netlkkh775_2: lkkh775.2 U8H.6 | length 20.1
  Top Layer w0.9: U8H.6 351.639,576.81 352.933,578.104 352.933,590.677 lkkh775.2
Netlkkh886_1: lkkh886.1 U22.7 | length 2.9
  Top Layer w0.9: lkkh886.1 376.944,617.601 377.973,618.629 379.107,618.629 U22.7
Netnnmu67_1: nnmu67.1 U1.1 | length 8.2
  Top Layer w0.9: U1.1 323.723,617.224 324.489,616.458 nnmu67.1
Netnnmu67_2: nnmu67.2 nnmuuv5.1 | length 8.5
  Top Layer w0.9: nnmuuv5.1 327.914,602.869 nnmu67.2
Netnnmuuv5_2: nnmuuv5.2 nnmuuv44.2 | length 8.1
  Top Layer w0.9: nnmuuv44.2 313.309,596.392 314.071,597.154 315.722,597.154 nnmuuv5.2
Netnnmuuv44_1: nnmuuv44.1 U8H.12 | length 49.6
  Top Layer w0.9: nnmuuv44.1 313.405,583.596 313.405,582.707 322.58,573.532 322.58,566.674 327.684,561.57 U8H.12
Netnnmuuv469_2: nnmuuv469.2 U8H.11 | length 44.2
  Top Layer w0.9: nnmuuv469.2 317.723,583.596 317.723,582.834 326.898,573.659 326.898,566.674 329.462,564.11 U8H.11
NetP?_2: P?.2 Restorrr6?.1 | length 3.5
  Top Layer w0.9: P?.2 433.951,637.921 434.459,637.413 Restorrr6?.1
NetPjh6_3: Pjh6.3 Pjjm9.1 Pjjm9.2 | length 19.6
  Top Layer w0.9: Pjjm9.1 378.841,549.183 378.206,549.818 378.206,562.095 378.733,562.622 381.52,562.622 Pjh6.3
Netpooi8_1: pooi8.1 pooi8.2 U22.14 | length 7.3
  Top Layer w0.9: U22.14 387.762,634.873 388.27,635.381 pooi8.2
Netpotatish_2: potatish.2 Restorr55rr?.1 Restorrr6?.2 | length 40.1
  Top Layer w0.9: Restorr55rr?.1 421.867,622.273 430.784,631.19 432.562,631.19 potatish.2 437.947,625.805 441.814,625.805 442.341,626.332 442.341,636.46 442.118,636.682 442.118,637.317 Restorrr6?.2
Netpoy6ال4_3: poy6ال4.3 Rggh4.2 | length 20.4
  Top Layer w0.9: poy6ال4.3 370.643,626.688 371.024,626.688 374.777,622.935 374.777,614.318 375.304,613.791 377.317,613.791 Rggh4.2
Netpoy63_3: poy63.3 U1.6 | length 18.8
  Top Layer w0.9: poy63.3 304.546,624.078 309.861,624.078 310.388,623.551 U1.6
Netpoyلل65_3: poyلل65.3 U22.6 | length 19.6
  Top Layer w0.9: poyلل65.3 366.498,626.618 368.225,628.345 372.038,628.345 378.972,621.411 U22.6
NetR55_3: R55.3 U1.13 | length 15.7
  Top Layer w0.9: R55.3 308.945,603.25 309.834,602.361 314.427,602.361 321.162,609.096 U1.13
NetR?_3: R?.3 U1.2 | length 7.9
  Top Layer w0.9: U1.2 321.056,622.3 321.818,622.3 R?.3
NetRdj7_1: Rdj7.1 U8H.18 | length 116.2
  Top Layer w0.9: Rdj7.1 302.26,570.865 305.943,567.182 306.051,567.182 306.578,566.655 306.578,556.895 317.627,545.846 365.487,545.846 366.014,546.373 366.014,563.583 365.487,564.11 U8H.18
NetRdje6_1: Rdje6.1 Refd.2 | length 3.4
  Top Layer w0.9: Rdje6.1 279.535,565.531 280.297,564.769 Refd.2
NetRdje6_2: Rdje6.2 Rejdu8.1 | length 4.2
  Top Layer w0.9: Rdje6.2 282.098,560.609 282.098,560.863 Rejdu8.1
NetRESF210K_2: RESF210K.2 SWRESET.1 U8H.1 | length 30.1
  Top Layer w0.9: RESF210K.2 340.868,593.217 SWRESET.1@343.408,590.677 ; SWRESET.1 SWRESET.1@343.408,590.677 ; U8H.1 347.675,591.025 347.675,595.554 346.003,597.226 345.258,597.226 343.408,595.376 SWRESET.1@343.408,590.677
NetREST3100_2: REST3100.2 SWRESET.2 | length 6.7
  Top Layer w0.9: REST3100.2 338.198,589.534 338.706,590.042 SWRESET.2
NetRestorr?_2: Restorr?.2 U22.12 | length 32.4
  Top Layer w0.9: U22.12 387.6,629.497 389.463,627.634 405.492,627.634 406.019,628.161 406.019,636.721 404.565,638.175 Restorr?.2
NetRg544estorr?_2: Rg544estorr?.2 U22.13 | length 21.5
  Top Layer w0.9: U22.13 389.657,632.185 391.922,629.92 400.05,629.92 403.86,633.73 403.86,635.485 403.77,635.574 403.77,636.059 Rg544estorr?.2@403.86,636.149
NetRggh4_1: Rggh4.1 U22.9 | length 20.3
  Top Layer w0.9: Rggh4.1 392.938,616.077 396.11,619.249 396.11,619.995 395.583,620.522 388.673,620.522 387.762,621.432 U22.9
NetRjd662_3: Rjd662.3 U1.9 | length 14.2
  Top Layer w0.9: Rjd662.3 302.26,602.869 306.705,607.314 308.627,607.314 310.409,609.096 U1.9
NetRldf54_1: Rldf54.1 U8H.17 | length 106.9
  Top Layer w0.9: Rldf54.1 301.625,574.421 309.245,566.801 309.245,557.657 318.77,548.132 363.201,548.132 363.728,548.659 363.728,561.067 363.201,561.594 356.834,561.594 U8H.17
NetRwas;kmc?_1: Rwas;kmc?.1 U22.4 | length 16
  Top Layer w0.9: U22.4 379.472,626.745 383.595,630.868 383.595,634.674 387.231,638.31 388.131,638.31 388.171,638.271
NetRwhhh6h?_2: Rwhhh6h?.2 U22.3 | length 26.1
  Top Layer w0.9: U22.3 379.472,629.412 381.995,631.935 381.995,635.337 386.568,639.91 390.672,639.91 392.407,638.175 Rwhhh6h?.2
NetRwhn4h?_2: Rwhn4h?.2 U22.5 | length 30.4
  Top Layer w0.9: U22.5 382.378,624.078 383.159,623.297 383.159,617.093 386.842,613.41 393.065,613.41 398.63,618.975 398.63,619.148 398.88,619.398 Rwhn4h?.2
NetTXRXHED3_2: TXRXHED3.2 U8H.3 | length 3.2
  Top Layer w0.9: TXRXHED3.2 346.571,583.426 348.023,583.426 349.028,584.43 U8H.3
VCC: "Res LED.1" *.9 CMain?.2 CY2.7 CY2.9 CY3.7 CY3.9 CY4.7 CY4.9 CY5.7 CY5.9 CY6.7 CY6.9 CY7.7 CY7.9 CY.7 CY.9 P?.1 Pjh6.2 potatish.1 poy63.1 R55.1 R?.1 regolator.3 RESF210K.1 Rjd662.1 Rwas;kmc?.2 Rwhh76.1 Sffg6.1 Sjj8.1 U1.4 U8H.7 | length 1422.4
  Top Layer w0.9: *.9 290.359,552.335 290.727,552.704 304.165,552.704 315.57,541.299 384.048,541.299 ; Rjd662.1 299.466,598.17 R55.1 310.134,599.44 315.214,599.44 320.291,604.517 321.037,604.517 321.564,603.99 321.564,596.392 RESF210K.1 326.517,591.439 327.406,591.439 331.692,587.153 336.307,587.153 U8H.7 352.528,574.27 354.838,576.58 354.838,589.801 356.603,591.566 385.699,591.566 ; poy63.1 299.847,630.714 295.326,635.235 295.326,641.341 296.493,642.507 CY3.9 293.497,645.503 293.497,652.653 ; U1.4 315.722,630.428 293.497,652.653 ; CY.7 316.743,652.507 316.493,652.507 CY.9 312.674,656.326 312.674,662.432 ; R?.1 323.469,633.222 ; Rwhh76.1 323.469,633.222 ; CY2.7 331.243,652.507 330.993,652.507 CY2.9 328.5,674.57 328.93,675 ; CY4.7 356.243,672.507 355.993,672.507 CY4.9 ; CY5.7@381.219,652.45 380.092,653.577 379.923,653.577 378.5,655 378.5,676.513 378.587,676.6 ; Pjh6.2 384.175,541.426 384.048,541.299 ; Sffg6.1 385.916,578.268 384.392,578.268 382.27,580.39 378.987,580.39 378.46,580.917 378.46,584.689 378.987,585.216 382.778,585.216 Sjj8.1 385.699,591.566 ; 388.366,646.049 388.501,646.049 389.136,646.684 389.89,646.684 389.89,654.473 390.417,655 CY6.9 ; CY6.7 393.4,654.85 393.15,654.85 CY6.9 ; CY7.7 413.4,644.85 413.15,644.85 CY7.9 413,671.58 ; CMain?.2@423.844,557.276 420.624,557.276 420.624,576.652 416.398,576.652 416.389,576.644 415.226,576.644 ; regolator.3 424.053,550.707 423.672,551.088 423.672,556.982 CMain?.2 ; 430.53,602.107 429.66,602.977 423.945,602.977 423.418,602.45 423.418,597.173 423.945,596.646 430.403,596.646 431.927,598.17 431.927,605.39 431.4,605.917 421.532,605.917 421.005,605.39 421.005,585.47 421.767,584.708 435.21,584.708 435.737,585.235 435.737,609.073 435.21,609.6 418.846,609.6 407.289,598.043 407.289,596.265 421.132,582.422 437.115,582.422 437.642,582.949 437.642,612.248 437.115,612.775 416.941,612.775 402.582,598.416 402.582,597.67 420.751,579.501 437.769,579.501 440.436,582.168 440.436,617.201 439.909,617.728 416.687,617.728 397.502,598.543 397.502,597.797 415.226,580.072 415.226,576.644 ; P?.1 444.119,640.461 ; potatish.1 437.007,624.205 444.119,624.205 ; 293.497,652.653 293.497,669.544 298.953,675 312.674,675 ; 312.674,662.432 312.674,675 ; 312.674,662.432 323.723,651.383 323.469,651.129 323.469,633.222 ; 312.674,675 328.93,675 ; 328.93,675 CY4.9 ; CY4.9 355.1,676.6 378.587,676.6 ; 378.587,676.6 392.642,676.6 392.938,676.304 ; 384.048,541.299 442.322,541.299 442.849,541.826 442.849,559.67 442.322,560.197 426.887,560.197 CMain?.2 ; 385.699,591.566 400.304,591.566 415.226,576.644 ; 392.938,676.304 393,676.242 CY6.9 ; 392.938,676.304 393.192,676.558 408.022,676.558 413,671.58 ; 413,671.58 444.119,640.461 ; CMain?.2 424.22,576.358 423.926,576.652 443.592,576.652 444.119,577.18 444.119,624.205 ; 444.119,624.205 444.119,640.461
pads on no net: U8H.20 U8H.21

## Other copper
Top Layer:
  text "PABFA BOTV1.CO 1402-1403 . 1300 - 3000 $ - 5 - 2 -> P.M - SABZEVAR IRAN - [EDISON] - AYOB HO - PAJOHESH SARA" at 401.637,460.311 h1.52

## Text inside footprints (layer, text, board x,y; h text height)
hhj7: Top Overlay "1" at 368.554,576.834 h1.27 r90; Top Overlay "2" at 363.728,574.929 h1.27 r90; Top Overlay "5" at 366.268,584.073 h1.27 r90; Top Overlay "6" at 363.728,584.073 h1.27 r90
"Main BT 9 - 15 V": Top Overlay "+" at 437.965,544.335 h1.15 r90